# Altium PCB PCB5.PcbDoc
Units mm, origin at the board's own origin, x right, y up, seen from the top; angles counter-clockwise.
Board outline 99.69 x 49.28 mm, 2 copper layers (Top Layer, Bottom Layer); 16 components, 10 nets, 42 pads, 0 vias.
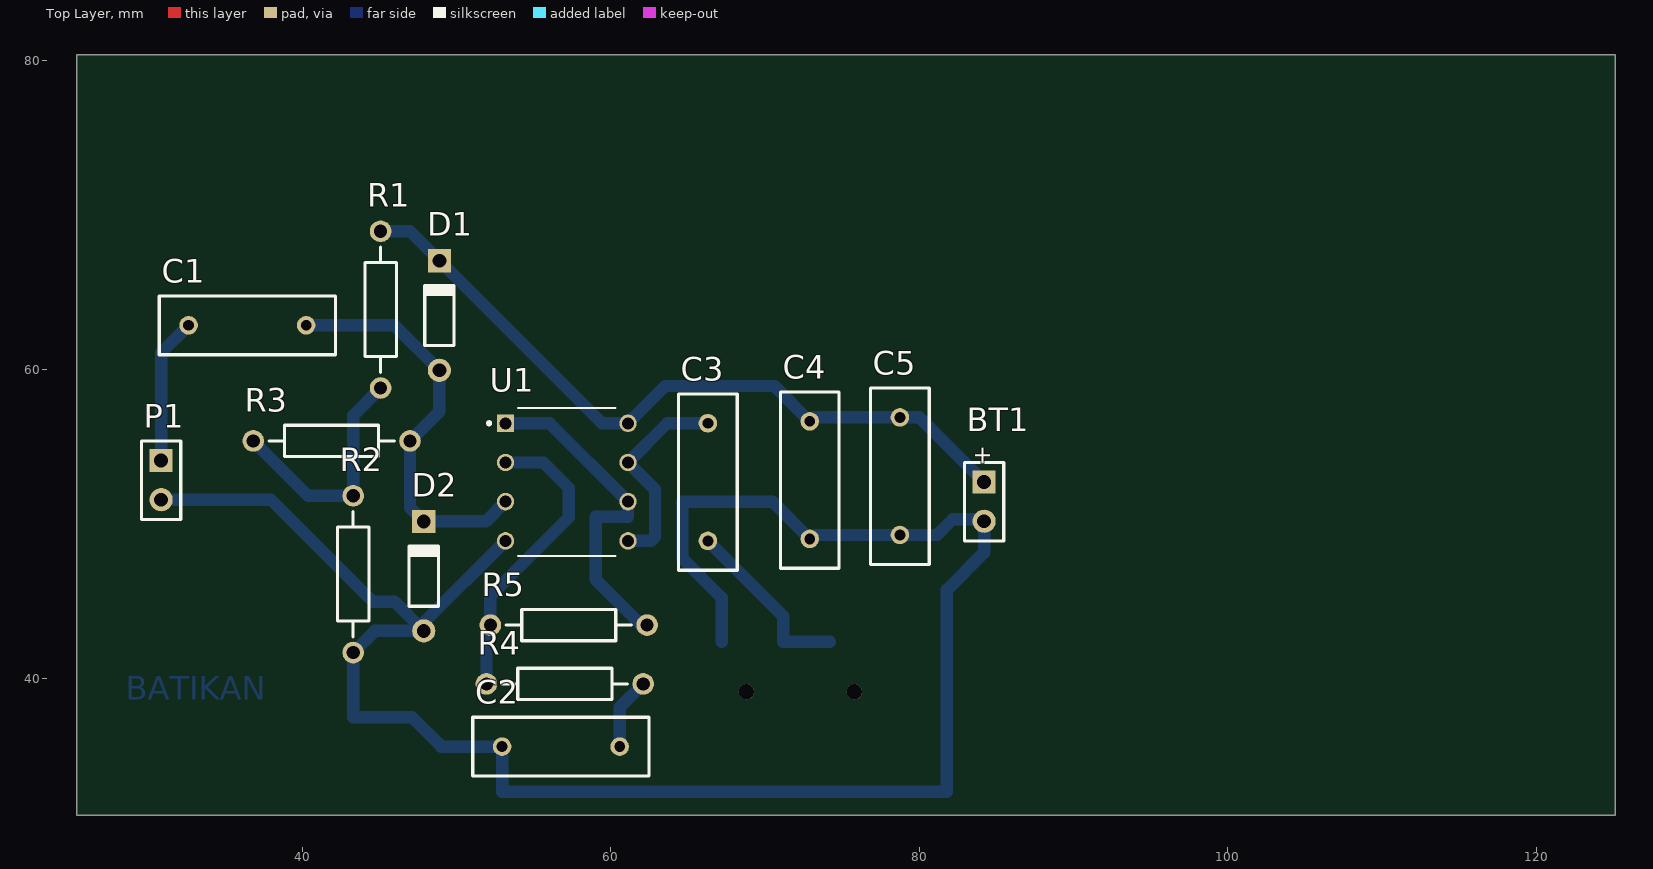
[diagram p0: Top Layer view]
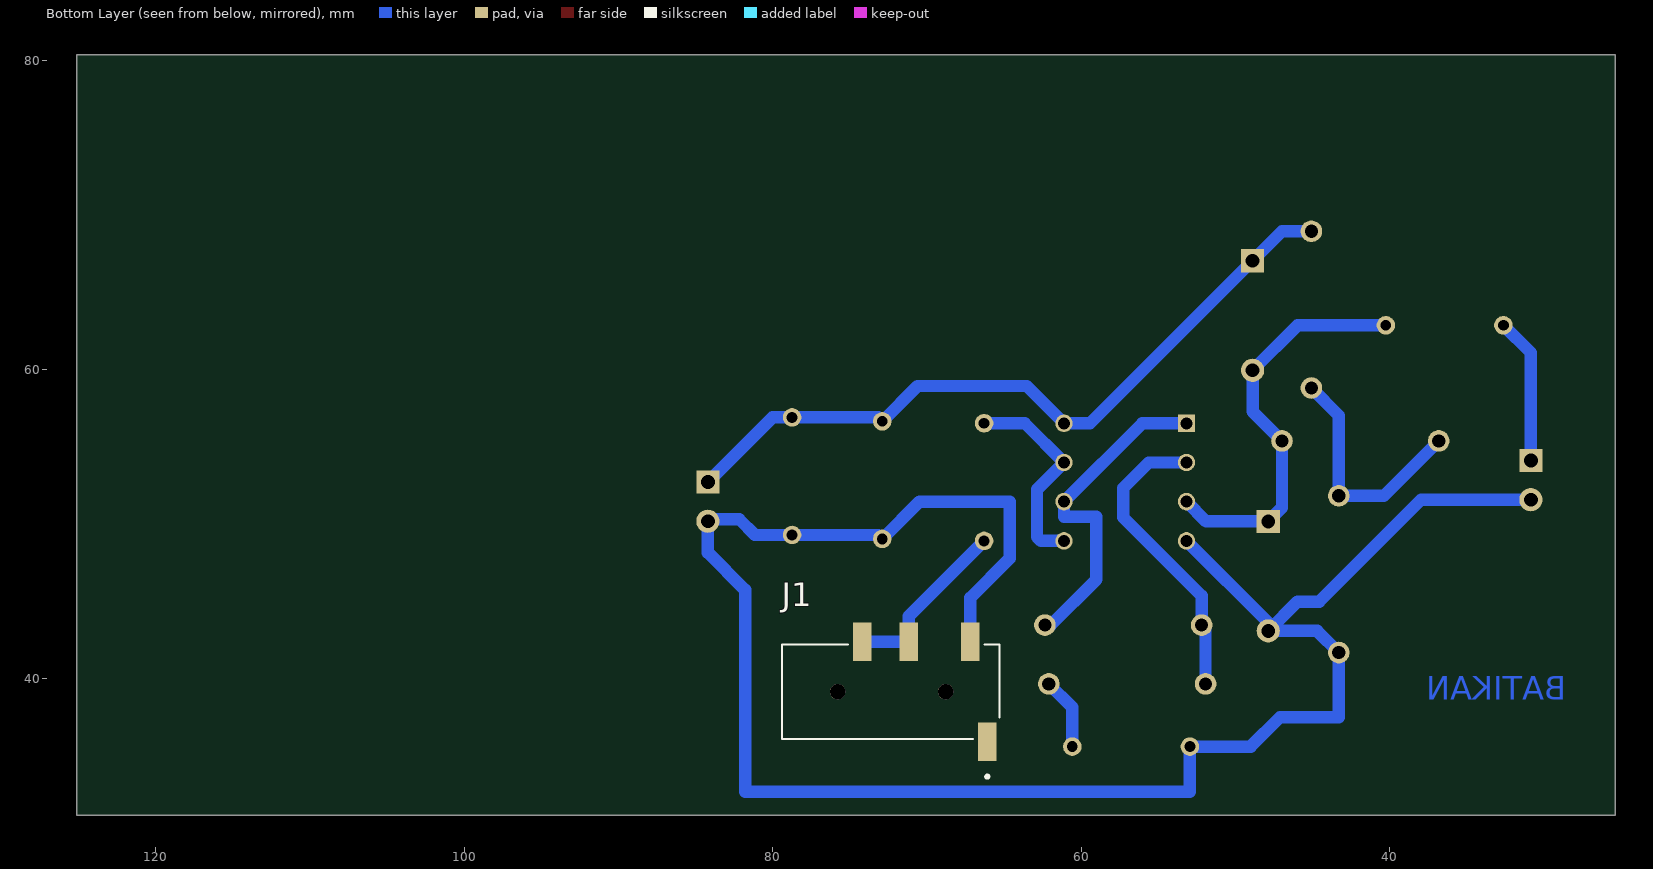
[diagram p1: Bottom Layer view, seen from below]

## Layer stack, top to bottom
Top Solder: solder mask 0.0102, Solder Resist, Dk 3.5
Top Layer: signal copper 0.0356
Dielectric 1: dielectric 0.32, FR-4, Dk 4.8
Bottom Layer: signal copper 0.0356
Bottom Solder: solder mask 0.0102, Solder Resist, Dk 3.5

## Board outline
25.4,31.115 125.095,31.115 125.095,80.391 25.4,80.391

## Design rules (kind name [scope] priority, off if disabled: settings)
Clearance [All] p1: gap=0.254 ignorepadtopadclearanceinfootprint=FALSE except(0: Arc-Hole Track-Hole SMDPad-Hole THPad-Hole Via-Hole Fill-Hole Poly-Hole Region-Hole Text-Hole)
PolygonConnect [All] p1: connectstyle=Relief reliefconductorwidth=0.254 reliefentries=4 polygonreliefangle="90 Angle" airgapwidth=0.254
RoutingVias [All] p1: holewidth=0.711 width=1.27 viastyle="Through Hole" minholewidth=0.711 minwidth=1.27 maxholewidth=0.711 maxwidth=1.27
SolderMaskExpansion [All] p1: expansion=0.102
Width [All] p1: maxlimit=0.8 minlimit=0.8 preferedwidth=0.8 minimp=50.000000 maximp=50.000000 favimp=50.000000
30 further rules are at their usual default settings.

## Classes and differential pairs
component class sismikenkazmod: BT1 C1 C2 C3 C4 C5 D1 D2 P1 R1 R2 R3 R4 R5

## Components (designator, comment, footprint, x,y, rotation, side; value= is the part's Value field where it differs from the comment)
BT1 "Battery" BAT-2 84.201,51.435 r270 top
C1 "Cap" RAD-0.3 36.449,62.865 r0 top value=100nF
C2 "Cap" RAD-0.3 56.769,35.56 r0 top value=1uF
C3 "Cap" RAD-0.3 66.294,52.705 r270 top value=220uF
C4 "Cap" RAD-0.3 72.898,52.832 r270 top value=100nF
C5 "Cap" RAD-0.3 78.74,53.086 r270 top value=10uF
D1 "Diode 1N4148" DO-35 48.895,63.5 r90 top
D2 "Diode 1N4148" DO-35 47.879,46.609 r90 top
J1 "PJ-320D-A" HRO_PJ-320D-A 72.29,39.116 r180 bottom
P1 "Header 2" HDR1X2 30.861,54.102 r270 top
R1 "Res2" AXIAL-0.4 45.085,63.881 r270 top value=100K
R2 "Res2" AXIAL-0.4 43.307,46.736 r270 top value=100K
R3 "Res2" AXIAL-0.4 41.91,55.372 r0 top value=1M
R4 "Res2" AXIAL-0.4 57.023,39.624 r0 top value=1K
R5 "Res2" AXIAL-0.4 57.277,43.434 r0 top value=1M
U1 "TL072IP" DIP794W45P254L959H508Q8 57.15,52.705 r0 top

## Footprints (in the part's own frame and the unit in brackets; to place one, negate y for a bottom-side part, rotate by r counter-clockwise, add the part's x,y. Pads: shape width x height; smd on the part's side, far side on the other; paste and mask are expansions set on the pad)
AXIAL-0.4 [mm] "Axial Device, Thru-Hole; 2 Leads; 0.4 in Pin Spacing"
  round 1.4 hole 0.85: 1(-5.08,0) 2(5.08,0)
  silkscreen extent -4.06,-1.02 4.06,1.02
BAT-2 [mm] "Battery; 2 Leads"
  rect 1.5x1.5 hole 0.9: 1(-1.27,0)
  round 1.5 hole 0.9: 2(1.27,0)
  silkscreen extent -2.54,-1.27 2.54,1.27
DIP794W45P254L959H508Q8 [mm]
  rect 1.13x1.13 / inner round 1.13 / far side rect 1.13x1.13 hole 0.78: 1(-3.97,3.81)
  round 1.13 hole 0.78: 2(-3.97,1.27) 3(-3.97,-1.27) 4(-3.97,-3.81) 5(3.97,-3.81) 6(3.97,-1.27) 7(3.97,1.27) 8(3.97,3.81)
  silkscreen extent -5.13,-4.79 3.17,4.79, body extent -3.94,-4.79 3.94,4.79, height 5.08
DO-35 [mm] "Diode, Axial; Body 3.8 x 1.9 mm (LxDia. max), Lead Dia. 0.53 mm (max)"
  round 1.5 hole 0.9: 1(-3.55,0)
  rect 1.5x1.5 hole 0.9: 2(3.55,0)
  silkscreen extent -1.95,-0.95 2.05,0.95
HDR1X2 [mm] "Connector; Header; 2 Position"
  rect 1.5x1.5 hole 0.9: 1(0,0)
  round 1.5 hole 0.9: 2(2.54,0)
  silkscreen extent -1.27,-1.27 3.81,1.27
HRO_PJ-320D-A [mm]
  rect 1.2x2.5 smd: 1(6.2,-3.25) 2(5.1,3.25) 3(1.1,3.25) 4(-1.9,3.25)
  round 1 hole 1 unplated: ""(-3.5,0) ""(3.5,0)
  silkscreen extent -7.1,-5.6 7,3.05, body extent -7.1,-4 7,4, height 5.3
RAD-0.3 [mm] "Radial Cap, Thru-Hole; 2 Leads; 0.3 in Pin Spacing"
  round 1.2 hole 0.7: 1(-3.81,0) 2(3.81,0)
  silkscreen extent -5.71,-1.91 5.71,1.91

## Part data
BT1: "Multicell Battery", LatestRevisionDate=17-Jul-2002, LatestRevisionNote="Re-released for DXP Platform.", PackageDescription="Battery; 2 Leads", PackageReference=BAT-2, Published=24-Mar-1999, Publisher="Altium Limited"
C1 C2 C3 C4 C5: "Capacitor", LatestRevisionDate=17-Jul-2002, LatestRevisionNote="Re-released for DXP Platform.", PackageDescription="Radial Cap, Thru-Hole; 2 Leads; 0.3 in Pin Spacing", PackageReference=RAD-0.3, Published=8-Jun-2000, Publisher="Altium Limited"
D1 D2: "High Conductance Fast Diode", Code_JEDEC=DO-204-AH, ComponentLink1Description="Manufacturer Link", ComponentLink1URL=http://www.fairchildsemi.com/, ComponentLink2Description=Datasheet, ComponentLink2URL=http://www.fairchildsemi.com/ds/1N%2F1N4148.pdf, DatasheetVersion=1997, LatestRevisionDate=17-Jul-2002, LatestRevisionNote="Re-released for DXP Platform.", PackageDescription="Diode, Axial; Body 3.8 x 1.9 mm (LxDia. max), Lead Dia. 0.53 mm (max)", PackageReference=DO-35, Published=8-Jun-2000, Publisher="Altium Limited"
J1: "Headphone jack 0.5A 30V DC 100 mΩ", Package=Package, Availability="Not in stock", Check_prices=https://www.snapeda.com/parts/PJ-320D-A/HRO+Electronics+Co.%252C+Ltd./view-part/?ref=eda, MF="HRO Electronics Co., Ltd.", MP=PJ-320D-A, Price=None, SnapEDA_Link=https://www.snapeda.com/parts/PJ-320D-A/HRO+Electronics+Co.%252C+Ltd./view-part/?ref=snap
P1: "Header, 2-Pin", LatestRevisionDate=17-Jul-2002, LatestRevisionNote="Re-released for DXP Platform.", Publisher="Altium Limited"
R1 R2 R3 R4 R5: "Resistor", LatestRevisionDate=17-Jul-2002, LatestRevisionNote="Re-released for DXP Platform.", PackageDescription="Axial Device, Thru-Hole; 2 Leads; 0.4 in Pin Spacing", PackageReference=AXIAL-0.4, Published=8-Jun-2000, Publisher="Altium Limited"
U1: "Dual, 30-V, 3-MHz, high slew rate (13-V/µs), In to V+, JFET-input op amp", Package="PDIP-8 Texas", Availability="In Stock", Check_prices=https://www.snapeda.com/parts/TL072IP/Texas+Instruments/view-part/?ref=eda, MF="Texas Instruments", MP=TL072IP, Price=None, Purchase-URL=https://pricing.snapeda.com/search/part/TL072IP/?ref=eda, SnapEDA_Link=https://www.snapeda.com/parts/TL072IP/Texas+Instruments/view-part/?ref=snap

## Nets (pads, with @x,y where several pads share a name; then routed paths per layer and width w, separated by ;. In a path a pad name is that pad's centre, name@x,y a point inside that pad or via, vN(x,y) a via of type N, cw(c..) or ccw(c..) an arc to the next point about the centre after c; other vN are vias at no path point)
+9V: BT1.1 C4.1 C5.1 D1.2 R1.1 U1.8 | length 48.2
  Bottom Layer w0.8: R1.1@44.958,68.961 R1.1 46.984,68.961 D1.2 59.43,56.515 U1.8 63.533,58.928 70.612,58.928 C4.1 73.152,56.896 C5.1 80.01,56.896 BT1.1
GND: BT1.2 C2.1 C4.2 C5.2 D2.1 J1.2 P1.2 R2.2 U1.4 | length 129.9
  Bottom Layer w0.8: P1.2 37.973,51.562 44.577,44.958 45.98,44.958 D2.1 ; U1.4 47.879,43.594 D2.1 ; J1.2 67.19,45.205 64.643,47.752 64.643,51.435 70.485,51.435 C4.2 73.152,49.276 C5.2 81.153,49.276 82.169,50.292 84.074,50.292 BT1.2 84.201,48.133 81.788,45.72 81.788,32.639 52.959,32.639 C2.1 49.022,35.56 47.117,37.465 43.307,37.465 R2.2 44.71,43.059 D2.1
NetC1_1: C1.1 P1.1 | length 9.5
  Bottom Layer w0.8: P1.1 30.861,61.087 C1.1
NetC1_2: C1.2 D1.1 D2.2 R3.2 U1.3 | length 26.6
  Bottom Layer w0.8: C1.2 45.98,62.865 D1.1 48.895,57.277 R3.2 46.99,51.048 D2.2 51.904,50.159 U1.3
NetC2_2: C2.2 R4.2 | length 4.7
  Bottom Layer w0.8: C2.2 60.579,38.1 R4.2
NetC3_1: C3.1 U1.5 U1.7 | length 13.6
  Bottom Layer w0.8: U1.5 62.611,48.895 62.865,49.149 62.865,52.23 U1.7 63.66,56.515 C3.1
NetC3_2: C3.2 J1.3 J1.4 | length 11.6
  Bottom Layer w0.8: C3.2 71.19,43.999 J1.3 J1.4
NetR1_2: R1.2 R2.1 R3.1 | length 15.7
  Bottom Layer w0.8: R3.1 40.386,51.816 R2.1 43.307,57.023 R1.2
NetR4_1: R4.1 R5.1 U1.2 | length 19.7
  Bottom Layer w0.8: R4.1 51.943,43.18 R5.1 52.197,45.339 57.277,50.419 57.277,52.324 55.626,53.975 U1.2
NetR5_2: R5.2 U1.1 U1.6 | length 21.7
  Bottom Layer w0.8: U1.1 56.04,56.515 U1.6 61.12,50.452 59.022,50.452 59.022,46.388 61.976,43.434 R5.2
pads on no net: J1. J1.1

## Other copper
Bottom Layer:
  text "BATIKAN" at 28.575,38.608 h1.52

## Silkscreen, mask and mechanical layers (free items; w line width, h text height)
Mechanical 1:
  the board outline again, w0.254

## Text inside footprints (layer, text, board x,y; h text height)
BT1: Top Overlay "+" at 83.624,55.105 h1.15 r270